# Altium PCB GameBoard - 手工.PcbDoc
Units mil, origin at the board's own origin, x right, y up, seen from the top; angles counter-clockwise.
Board outline 3950 x 1400 mil, 2 copper layers (Top Layer, Bottom Layer); 17 components, 22 nets, 94 pads, 0 vias.
Unrouted connection lines stored in the file: 4.
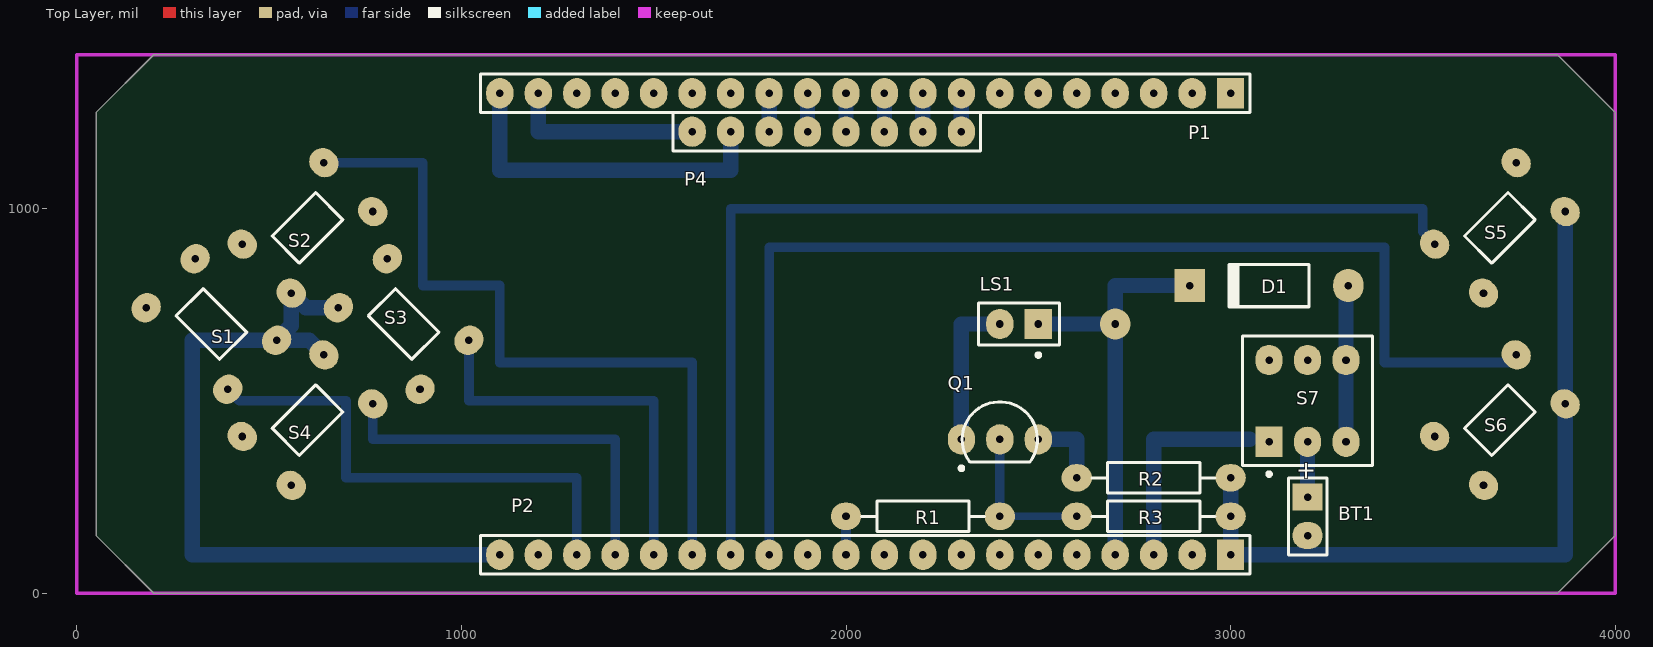
[diagram p0: Top Layer view]
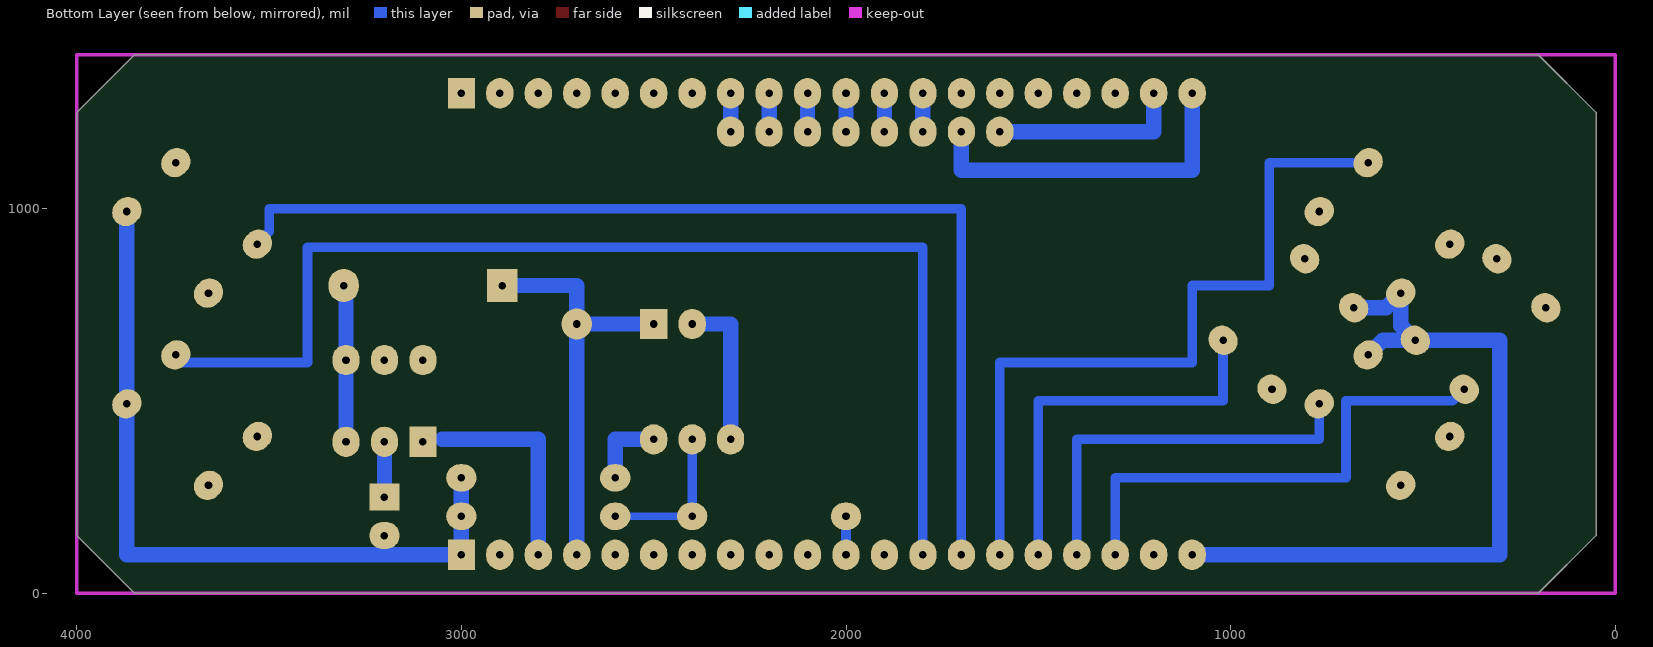
[diagram p1: Bottom Layer view, seen from below]

## Layer stack, top to bottom
Top Layer: signal copper 1.4
Dielectric: dielectric 12.6, FR-4, Dk 4.8
Bottom Layer: signal copper 1.4

## Board outline
50,150 50,1250 200,1400 3850,1400 4000,1250 4000,150 3850,0 200,0

## Design rules (kind name [scope] priority, off if disabled: settings)
Clearance [All] p1: gap=10
ComponentClearance [All] p1 off: gap=10 collisioncheckmode=3 verticalgap=10 showdistances=FALSE
PolygonConnect [All] p1: connectstyle=Relief reliefconductorwidth=10 reliefentries=4 polygonreliefangle="90 Angle"
RoutingVias [All] p1: holewidth=28 width=50 viastyle="Through Hole" minholewidth=28 minwidth=50 maxholewidth=28 maxwidth=50
SilkscreenOverComponentPads [All] p1: minsilkscreentomaskgap=10
SolderMaskExpansion [All] p1: expansion=4
Width [All] p1: maxlimit=40 minlimit=10 preferedwidth=20
26 further rules are at their usual default settings.

## Components (designator, comment, footprint, x,y, rotation, side; value= is the part's Value field where it differs from the comment)
BT1 "Battery" BAT-2 3200,200 r270 top
D1 "Diode 1N5819" DO-204AL 3100,800 r180 top
LS1 "Speaker" PIN2 2500,700 r180 top
P1 "Header 20" HDR1X20 3000,1300 r180 top
P2 "Header 20" HDR1X20 3000,100 r180 top
P4 "Header 8" HDR1X8 2300,1200 r180 top
Q1 "S8050" TO-92 2400,400 r270 top
R1 "Res2" AXIAL-0.4 2200,200 r0 top
R2 "Res2" AXIAL-0.4 2800,300 r180 top
R3 "Res2" AXIAL-0.4 2800,200 r180 top
S1 "SW-PB4" SW-PB-4P 350,700 r315 top
S2 "SW-PB4" SW-PB-4P 600,950 r225 top
S3 "SW-PB4" SW-PB-4P 850,700 r135 top
S4 "SW-PB4" SW-PB-4P 600,450 r45 top
S5 "SW-PB4" SW-PB-4P 3700,950 r225 top
S6 "SW-PB4" SW-PB-4P 3700,450 r225 top
S7 "SW-DPDT" DPDT-6P 3200,500 r90 top

## Footprints (in the part's own frame and the unit in brackets; to place one, negate y for a bottom-side part, rotate by r counter-clockwise, add the part's x,y. Pads: shape width x height; smd on the part's side, far side on the other; paste and mask are expansions set on the pad)
AXIAL-0.4 [mm] "Axial Device, Thru-Hole; 2 Leads; 0.4 in Pin Spacing"
  oval 2x1.8 hole 0.5: 1(-5.08,0) 2(5.08,0)
  silkscreen extent -4.06,-1.02 4.06,1.02
BAT-2 [mm] "Battery; 2 Leads"
  rect 1.8x2 hole 0.5: 1(-1.27,0)
  oval 1.8x2 hole 0.5: 2(1.27,0)
  silkscreen extent -2.54,-1.27 2.54,1.27
DO-204AL [mm] "Diode, Axial; Body 5.2 x 2.7 mm (LxDia. max), Lead Dia. 0.86 mm (max)"
  oval 2x2.2 hole 0.5: 1(-5.23,0)
  rect 2x2.2 hole 0.5: 2(5.23,0)
  silkscreen extent -2.65,-1.4 2.75,1.4
DPDT-6P [mm] "DPDT Push Swit"
  rect 2x1.8 hole 0.5: 1(-2.7,2.54)
  oval 2x1.8 hole 0.5: 2(-2.7,0) 3(-2.7,-2.54) 4(2.7,-2.54) 5(2.7,0) 6(2.7,2.54)
  silkscreen extent -4.96,-4.3 4.28,4.3, body extent -4.3,-4.3 4.3,4.3, height 14
HDR1X8 [mm] "Connector; Header; 8 Position"
  oval 1.8x2 hole 0.5: 1(0,0) 2(2.54,0) 3(5.08,0) 4(7.62,0) 5(10.16,0) 6(12.7,0) 7(15.24,0) 8(17.78,0)
  silkscreen extent -1.27,-1.27 19.05,1.27
HDR1X20 [mm] "Connector; Header; 20 Position"
  rect 1.8x2 hole 0.5: 1(0,0)
  oval 1.8x2 hole 0.5: 2(2.54,0) 3(5.08,0) 4(7.62,0) 5(10.16,0) 6(12.7,0) 7(15.24,0) 8(17.78,0) 9(20.32,0) 10(22.86,0) 11(25.4,0) 12(27.94,0) 13(30.48,0) 14(33.02,0) 15(35.56,0) 16(38.1,0) 17(40.64,0) 18(43.18,0) 19(45.72,0) 20(48.26,0)
  silkscreen extent -1.27,-1.27 49.53,1.27
PIN2 [mm] "Photosensitive Diode; 2 Leads"
  rect 1.8x2 hole 0.5: 1(0,0)
  oval 1.8x2 hole 0.5: 2(2.54,0)
  silkscreen extent -1.4,-1.4 3.94,2.17
SW-PB-4P [mm]
  oval 1.8x2 hole 0.5: 1(-3.81,2.286) 2(-3.81,-2.286) 3(3.81,-2.286) 4(3.81,2.286)
  silkscreen extent -2.03,-1.27 2.03,1.27, body extent -3.05,-3.05 3.05,3.05, height 3.5
TO-92 [mm] "TO, Flat Index; 3 In-Line, Axial Leads; Body Dia. 4.5mm; Leads 0.51 x 0.48 mm (max)"
  oval 2x1.8 hole 0.5: 1(0,-2.54) 2(0,0) 3(0,2.54)
  silkscreen extent -2.48,-2.66 2.03,2.48, body extent -2.5,-2.5 1.5,2.5, height 6.86

## Part data
BT1: "Multicell Battery"
D1: library part "Diode 11DQ03", "Schottky Rectifier"
LS1: "Loudspeaker"
P1 P2: "Header, 20-Pin"
P4: "Header, 8-Pin"
Q1: library part NPN, "NPN Bipolar Transistor"
R1 R2 R3: "Resistor"
S1 S2 S3 S4 S5 S6: "普通4"
S7: "双刀双掷开关"

## Free pads (board coordinates)
  round 80 hole 19.68: 1(2700,700)

## Nets (pads, with @x,y where several pads share a name; then routed paths per layer and width w, separated by ;. In a path a pad name is that pad's centre, name@x,y a point inside that pad or via, vN(x,y) a via of type N, cw(c..) or ccw(c..) an arc to the next point about the centre after c; other vN are vias at no path point)
GND: BT1.2 P1.20 P2.1 P2.20 P4.7 R2.1 R3.1 S1.4 S2.4 S3.4 S4.4 S5.1 S6.1 | length 4904.6
  Bottom Layer w40: S4.4 604.56,657.57 S1.4 ; S3.4 595.44,742.43 S2.4 557.57,695.44 S1.4 ; P2.20 300,100 300,657.57 S1.4 ; P1.20 1100,1100 1700,1100 P4.7 ; R2.1 R3.1 P2.1 3200,100 ; BT1.2 3200,100 ; S5.1 S6.1 3869.71,100 3200,100
KEY1: P2.18 S1.3 | length 1320.1
  Bottom Layer w25: S1.3 422.72,500 700,500 700,300 1300,300 P2.18
KEY2: P2.15 S2.2 | length 1977.3
  Bottom Layer w25: S2.2 900,1119.71 900,800 1100,800 1100,600 1600,600 P2.15
KEY3: P2.16 S3.2 | length 1037.9
  Bottom Layer w25: S3.2 1019.71,500 1500,500 P2.16
KEY4: P2.17 S4.3 | length 1022.7
  Bottom Layer w25: S4.3 769.71,400 1400,400 P2.17
KEY5: P2.14 S5.3 | length 2802.4
  Bottom Layer w25: P2.14 1700,1000 3500,1000 3500,940 S5.3@3530,910
KEY6: P2.13 S6.2 | length 3050.6
  Bottom Layer w25: P2.13 1800,900 3400,900 3400,600 3722.72,600 S6.2
NetBT1_1: BT1.1 S7.2 S7.5 | length 150
  Bottom Layer w40: BT1.1 S7.2@3200,400
NetD1_1: D1.1 S7.3 S7.4 | length 400
  Bottom Layer w40: S7.3@3300,400 D1.1@3300,800
NetLS1_2: LS1.2 Q1.1 | length 400
  Bottom Layer w40: Q1.1 2300,700 LS1.2
NetQ1_2: Q1.2 R1.2 R3.2 | length 400
  Bottom Layer w20: R1.2 R3.2
  Bottom Layer w25: R1.2 Q1.2
NetQ1_3: Q1.3 R2.2 | length 200
  Bottom Layer w40: Q1.3 2600,400 R2.2
PB6: P1.13 P4.6 | length 100
  Bottom Layer w40: P4.6 P1.13
PB7: P1.12 P4.5 | length 100
  Bottom Layer w40: P4.5 P1.12
PB8: P1.11 P4.4 | length 100
  Bottom Layer w40: P4.4 P1.11
PB9: P1.10 P4.3 | length 100
  Bottom Layer w40: P4.3 P1.10
PB10: P1.9 P4.2 | length 100
  Bottom Layer w40: P4.2 P1.9
PB11: P1.8 P4.1 | length 100
  Bottom Layer w40: P4.1 P1.8
SND_OUT: P2.11 R1.1 | length 100
  Bottom Layer w25: P2.11 R1.1
VBAT: P2.3 S7.1 S7.6 | length 550
  Bottom Layer w40: P2.3 2800,400 3050,400
VCC: P1.19 P4.8 | length 500
  Bottom Layer w40: P1.19 1200,1200 P4.8
VIN: D1.2 LS1.1 P2.4 pad.1 | length 1094.1
  Bottom Layer w40: LS1.1 pad.1 ; P2.4 pad.1 ; D1.2 2700,800 pad.1
pads on no net: P1.1 P1.2 P1.3 P1.4 P1.5 P1.6 P1.7 P1.14 P1.15 P1.16 P1.17 P1.18 P2.2 P2.5 P2.6 P2.7 P2.8 P2.9 P2.10 P2.12 P2.19 S1.1 S1.2 S2.1 S2.3 S3.1 S3.3 S4.1 S4.2 S5.2 S5.4 S6.3 S6.4

## Keep-outs
Keep-Out Layer:
  lines w10: 0,0 0,1400 4000,1400 4000,0 0,0

## Dimensions
0,20 to 4000,0 on Mechanical 13
4000,0 to 4000,1400 on Mechanical 13

## Text inside footprints (layer, text, board x,y; h text height)
BT1: Top Overlay "+" at 3177.28,344.49 h45.28 r270